# EAGLE board akabeacon_circle_MDBT40_type1_panellize (EAGLE 7.4.0)
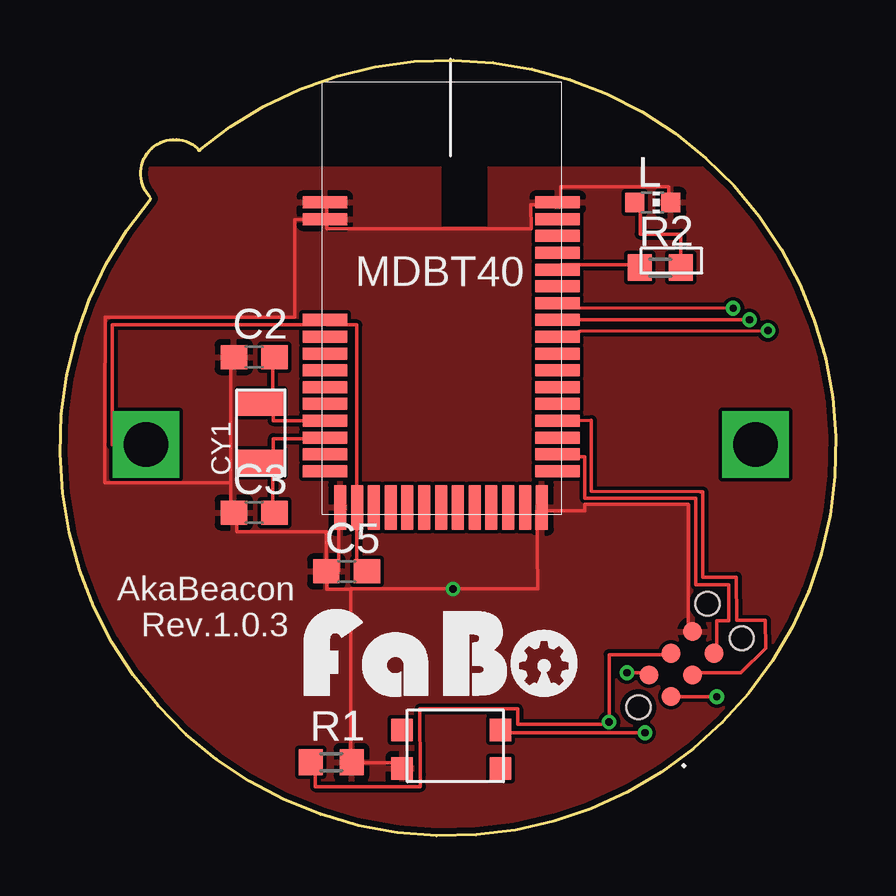
[diagram p0: board, top side]
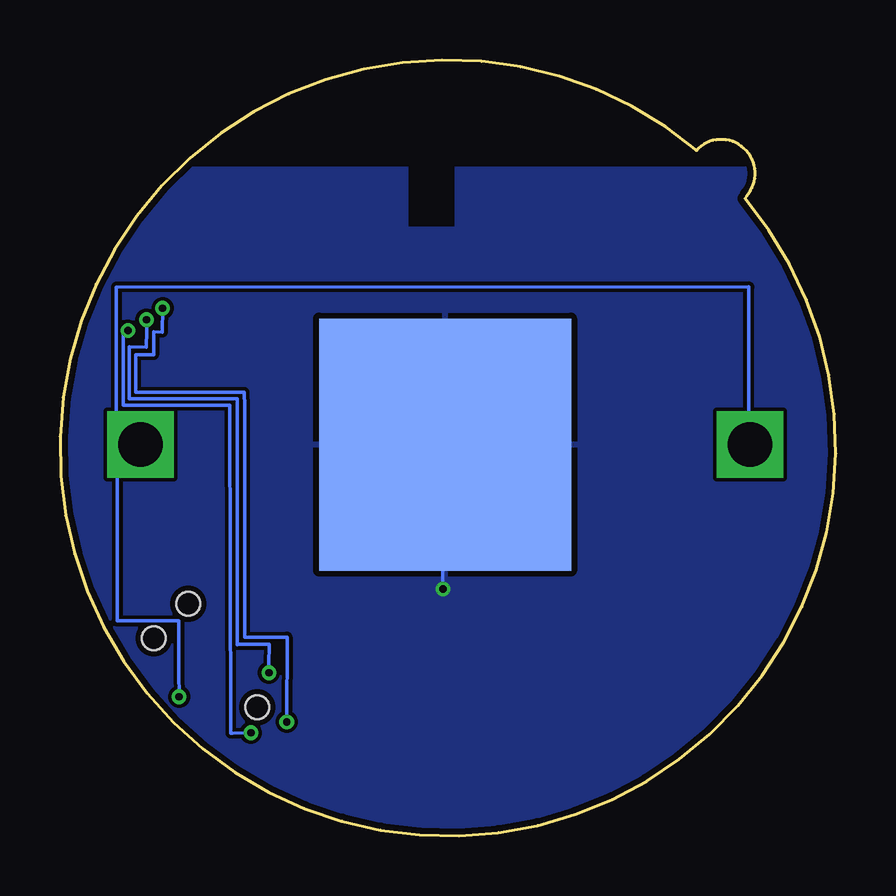
[diagram p1: board, bottom side, seen from below]

Size 32.32 x 32.32 mm. Coordinates in mm from the lower left corner, seen from the top.
Copper layers (1*16): Top 0.035mm / dielectric 1.5mm / Bottom 0.035mm
Design rules "SeeedStudio_2layer_DRU_no_angle_20140221": minimum track width 6mil, minimum drill 12mil, track to track 6mil, track to pad 6mil, pad to pad 6mil, via to via 6mil, smd to smd 0mil, copper to edge 10mil, drill to drill 10mil, minimum pad ring 10mil, minimum via ring 6mil, stop-mask expansion 2mil, vias tented up to drill 100mil, thermal gap 10mil

## Footprints (pad centres in the part's own frame; a part is rotated, then mirrored left to right if it is on the bottom)
TC2030-IDC-NL = smd 0.787 x 0.787: 1 -1.27,-0.635; 2 -1.27,0.635; 3 0,-0.635; 4 0,0.635; 5 1.27,-0.635; 6 1.27,0.635 | hole 0.991: -2.54,0; 2.54,1.016; 2.54,-1.016
C0603 = smd 1.1 x 1: 1 -0.85,0; 2 0.85,0
ABRACOM-ABS07-32.768KHZ = smd 1.1 x 1.9: P$1 -1.25,0; P$2 1.25,0
CHIP-LED0603 = smd 0.8 x 0.8: A 0,-0.75; C 0,0.75
R0603 = smd 1 x 1.1: 1 -0.85,0; 2 0.85,0
RAYTAC-MDBT40 = smd 1.85 x 0.5: 1 -4.86,4; 2 -4.86,3.3; 3 -4.86,-0.9; 4 -4.86,-1.6; 5 -4.86,-2.3; 6 -4.86,-3; 7 -4.86,-3.7; 8 -4.86,-4.4; 9 -4.86,-5.1; 10 -4.86,-5.8; 11 -4.86,-6.5; 12 -4.86,-7.2; 26 4.84,-7.2; 27 4.84,-6.5; 28 4.84,-5.8; 29 4.84,-5.1; 30 4.84,-4.4; 31 4.84,-3.7; 32 4.84,-3; 33 4.84,-2.3; 34 4.84,-1.6; 35 4.84,-0.9; 36 4.84,-0.2; 37 4.84,0.5; 38 4.84,1.2; 39 4.84,1.9; 40 4.84,2.6; 41 4.84,3.3; 42 4.84,4 | smd 0.5 x 1.85: 13 -4.22,-8.71; 14 -3.52,-8.71; 15 -2.82,-8.71; 16 -2.12,-8.71; 17 -1.42,-8.71; 18 -0.72,-8.71; 19 -0.02,-8.71; 20 0.68,-8.71; 21 1.38,-8.71; 22 2.08,-8.71; 23 2.78,-8.71; 24 3.48,-8.71; 25 4.18,-8.71
CIRCLE-TYPE2-TC2030 = smd 10.5 x 10.5 bottom: GND 0,0 | drill 1.85 square: P$1 -12.7,0; P$2 12.7,0
SWITCH-4P(KMR2) = smd 0.9 x 0.95: 1 -1,0; 2 3.1,0; 3 -1,-1.6; 4 3.1,-1.6

## Placement (x,y rotation side)
.  [TC2030-IDC-NL]  25.9,7.16 45 top
C2  [C0603]  8.09,19.94 0 top
C3  [C0603]  8.1,13.47 0 top
C5  1uf  [C0603]  11.94,11.01 0 top
CY1  CRYSTALABS07  [ABRACOM-ABS07-32.768KHZ]  8.37,16.8 90 top
L  [CHIP-LED0603]  24.69,26.39 270 top
R1  [R0603]  11.3,3.07 0 top
R2  [R0603]  25.01,23.68 0 top
U$1  RAYTAC-MDBT40  [RAYTAC-MDBT40]  15.9,22.39 0 top
U$2  [LOGO_FABO_M]  15.87,5.8 0 top
U$3  CIRCLE-TYPE2  [CIRCLE-TYPE2-TC2030]  16.28,16.3 0 top
U$5  SWICTH-4P(KMR2)  [SWITCH-4P(KMR2)]  15.25,4.41 0 top

## Library data of the parts
. = TagConnect
C2 C3 C5 R1 R2 = adafruit
CY1 = FaBo-Crystal
L = led
U$1 = FaBo-BT
U$2 = FaBo
U$3 = FaBo-Template
U$5 = gclue-test

## Nets
+3V3: ..1 C5.2 U$1.3 U$1.14 U$3.P$1 U$3.P$2
GND: ..6 C2.1 C3.1 C5.1 L.C R1.2 U$1.1 U$1.2 U$1.13 U$1.25 U$1.42 U$3.GND U$5.3
N$1: L.A R2.2
N$7: C2.2 CY1.P$2 U$1.9
N$8: C3.2 CY1.P$1 U$1.10
P0_00: U$1.17
P0_01: U$1.18
P0_02: U$1.19
P0_03: U$1.20
P0_04: U$1.21
P0_05: U$1.22
P0_06: U$1.23
P0_07: U$1.24
P0_08: U$1.26
P0_09: ..5 U$1.27
P0_10: U$1.28
P0_11: ..3 U$1.29
P0_12: U$1.30
P0_13: U$1.31
P0_14: U$1.32
P0_15: U$1.33
P0_16: U$1.34 U$5.2
P0_18: R2.1 U$1.38
P0_19: U$1.39
P0_21: U$1.4
P0_22: U$1.5
P0_23: U$1.6
P0_24: U$1.7
P0_25: U$1.8
P0_28: U$1.11
P0_29: U$1.12
P0_30: U$1.16
SWCLK: ..4 R1.1 U$1.36
SWDIO: ..2 U$1.35

## Tracks (layer width: path | path; a pad name or v marks a point on that pad's centre or on a via)
+3V3  (via drill 0.3)
  Top 0.152: v27.36,5.8 25.62,5.8 ..1 | C5.2 12.63,11.02 12.37,11.34 12.37,12.8 12.37,13.55 U$1.14 12.37,13.8 12.37,21.28 12.12,21.3 11.12,21.3 U$1.3 10.87,21.3 2.18,21.3 2.18,16.29 3.62,16.31 U$3.P$1
  Bottom 0.152: v27.36,5.8 27.37,6.8 27.37,8.97 29.94,8.96 29.94,16.3 U$3.P$2 29.99,16.29 29.98,22.86 3.62,22.88 3.62,16.55 U$3.P$1
GND  (via drill 0.3)
  Top 0.15: 20.12,13.55 21.87,13.55 21.87,13.82 26.17,13.82 26.17,13.55 | 7.36,12.68 11.09,12.68 C5.1
  Top 0.152: U$1.2 11.12,25.8 11.12,26.3 U$1.1 | L.C 25.37,26.55 25.37,27.05 20.87,27.05 20.87,26.55 U$1.42 20.62,26.3 19.62,26.3 19.63,25.3 11.11,25.3 11.12,25.55 U$1.2 | 26.17,13.55 26.17,8.55 ..6 | 20.12,13.55 U$1.25 19.87,13.55 19.9,10.28 v16.37,10.28 12.12,10.28 12.12,10.27 | U$5.3 14.12,3.05 12.37,3.05 R1.2 12.12,3.3 12.12,10.27 | 7.36,12.68 7.37,13.3 C3.1 7.12,13.55 7.12,14.71 | 10.87,11.05 C5.1 | 7.12,14.71 7.12,19.8 C2.1 | 12.12,10.27 11.12,10.27 11.12,10.8 C5.1 | U$1.13 11.62,13.55 11.62,11.05 11.12,11.05 C5.1 | 7.12,14.71 1.87,14.71 1.87,17.8 1.88,21.61 9.77,21.61 9.78,25.68 U$1.2
  Bottom 0.152: v16.37,10.28 16.37,16.3 U$3.GND
  pour Top: -0.63,-0.7 33.37,-0.7 33.37,32.3 -0.63,32.3
  pour Bottom: -0.63,-0.7 33.37,-0.7 33.37,32.3 -0.63,32.3
N$1
  Top 0.15: 24.12,26.3 24.17,26.3 24.17,25.07 25.86,25.07 R2.2
  Top 0.152: 25.87,24.55 25.87,23.8 R2.2 | 24.12,26.3 L.A
N$7
  Top 0.152: 8.87,18.05 8.87,19.8 C2.2 | 8.87,18.05 8.88,17.3 10.87,17.3 U$1.9 | 8.87,18.05 CY1.P$2
N$8
  Top 0.152: 8.87,15.55 8.87,13.55 C3.2 | 8.87,15.55 8.89,16.55 10.87,16.55 U$1.10 | 8.87,15.55 CY1.P$1
P0_09
  Top 0.15: 26.49,14.07 26.49,10.47 27.87,10.47 27.87,8.97
  Top 0.152: 27.87,8.97 27.37,8.97 27.37,7.8 ..5 | 26.49,14.07 21.87,14.07 21.87,15.8 20.87,15.8 U$1.27
P0_11
  Top 0.15: 26.68,14.33 26.79,14.33 26.79,10.77 28.18,10.77 28.19,8.97 29.4,8.97 29.41,7.82
  Top 0.152: 29.41,7.82 28.37,6.8 26.62,6.8 26.37,6.55 ..3 | 26.68,14.33 22.13,14.35 22.14,17.31 20.87,17.3 U$1.29
P0_16  (via drill 0.3)
  Top 0.152: v24.37,4.3 18.37,4.3 U$5.2 | v29.5,21.05 21.68,21.02 20.87,20.8 U$1.34
  Bottom 0.14: 25.15,4.28 25.22,4.28 25.24,17.94 29.42,17.94 29.69,17.94 29.69,18.56 29.69,21.06 v29.5,21.05
  Bottom 0.152: 25.15,4.28 v24.37,4.3
P0_18
  Top 0.152: R2.1 24.12,23.8 20.87,23.8 U$1.38
SWCLK  (via drill 0.3)
  Top 0.15: 25.12,7.55 22.88,7.55 v22.88,4.75 22.88,4.65 19.07,4.65 19.07,5.29 15,5.29
  Top 0.152: 25.12,7.55 25.37,7.8 ..4 | 15,5.29 15.01,2.55 15.01,2.05 10.64,2.05 10.62,3.05 R1.1 | v28.05,21.98 20.87,22 U$1.36
  Bottom 0.14: 28.42,20.04 29.16,20.04 29.16,18.49 24.64,18.49 24.64,18.29 24.64,18.07 24.64,8.26
  Bottom 0.15: v28.05,21.98 28.06,20.99 28.42,21 28.42,20.04 | 24.64,8.26 22.86,8.28 v22.88,4.75
SWDIO  (via drill 0.3)
  Top 0.152: v23.62,6.8 24.37,6.8 ..2 | v28.72,21.5 20.55,21.51 20.87,21.38 U$1.35
  Bottom 0.14: 24.83,7.97 24.93,7.96 24.95,18.2
  Bottom 0.15: v28.72,21.5 28.72,21.05 28.73,20.36 29.44,20.37 29.43,18.22 24.95,18.2 | 24.83,7.97 24.08,7.97 23.62,7.98 23.62,7.14 v23.62,6.8

## Text on the board
tPlace: AkaBeacon | Rev.1.0.3
_tNames: L | L | R2 | R2 | C2 | C2 | CY1 | CY1 | C3 | C3 | C5 | C5 | R1 | R1 | . | .